# Altium PCB PCB.PcbDoc
Units mm, origin at the board's own origin, x right, y up, seen from the top; angles counter-clockwise.
Board outline 90 x 58 mm, 2 copper layers (Top Layer, Bottom Layer); 42 components, 34 nets, 227 pads, 40 vias.
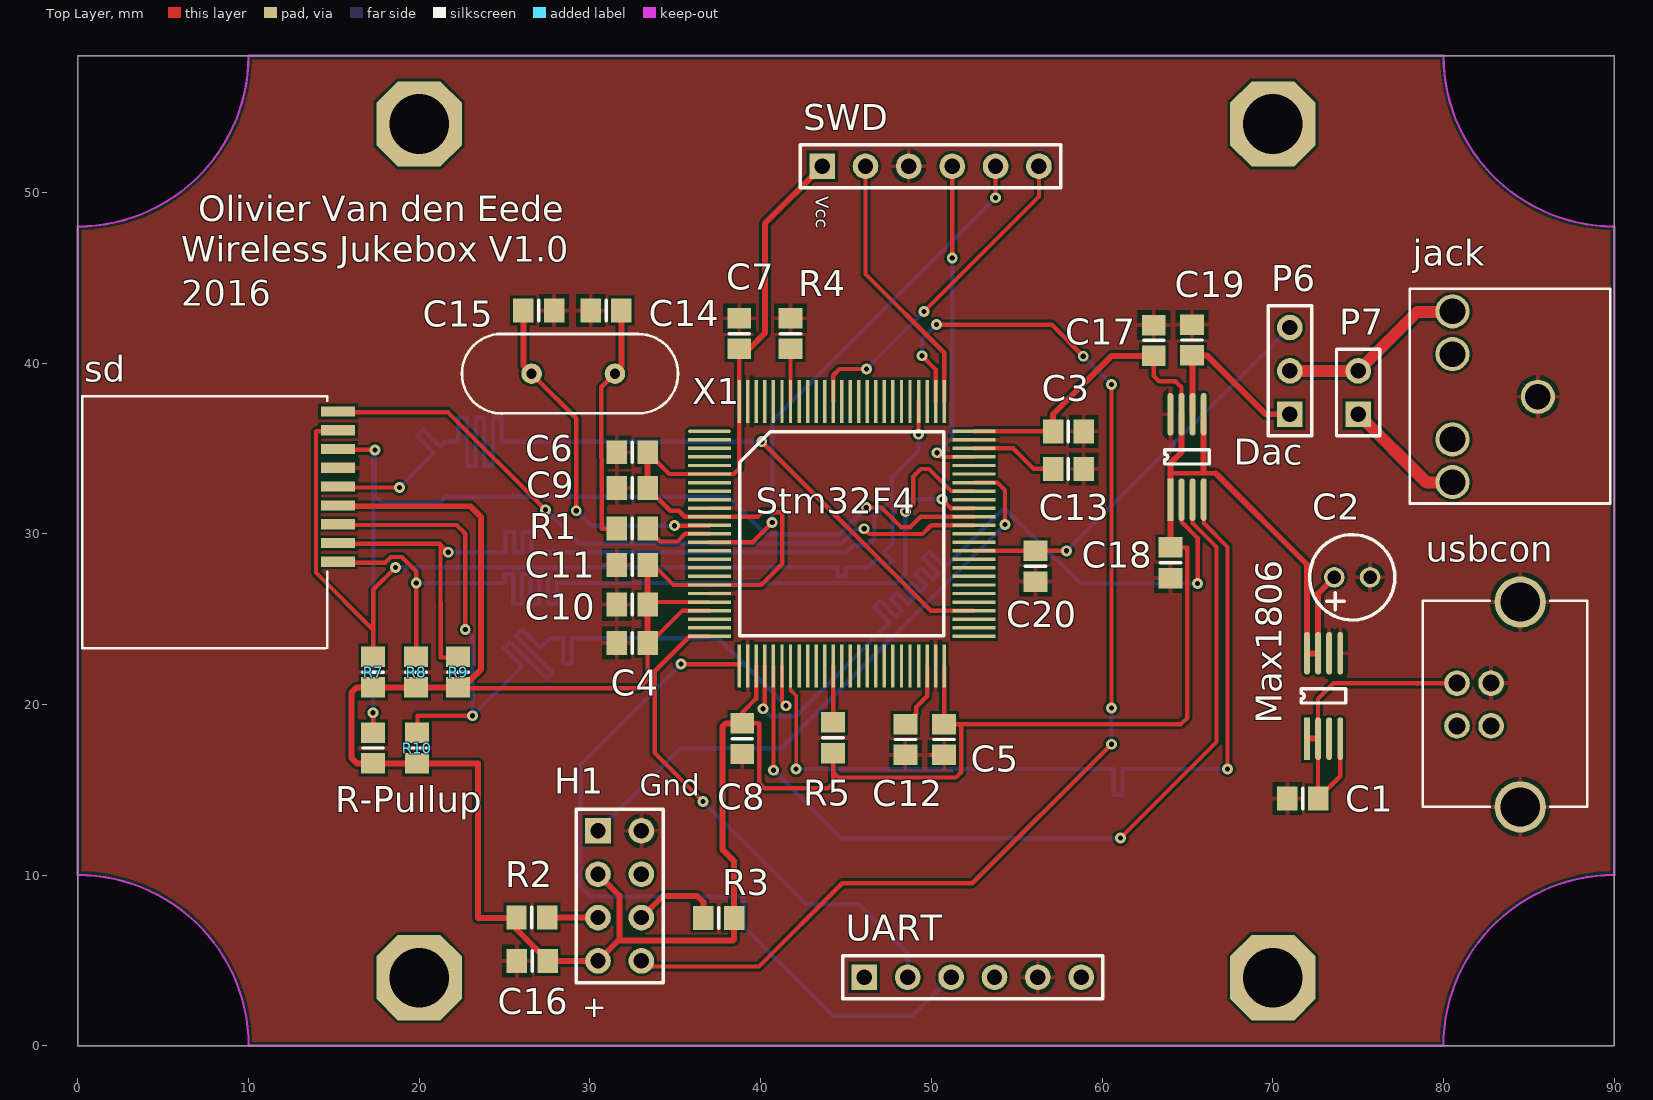
[diagram p0: Top Layer view]
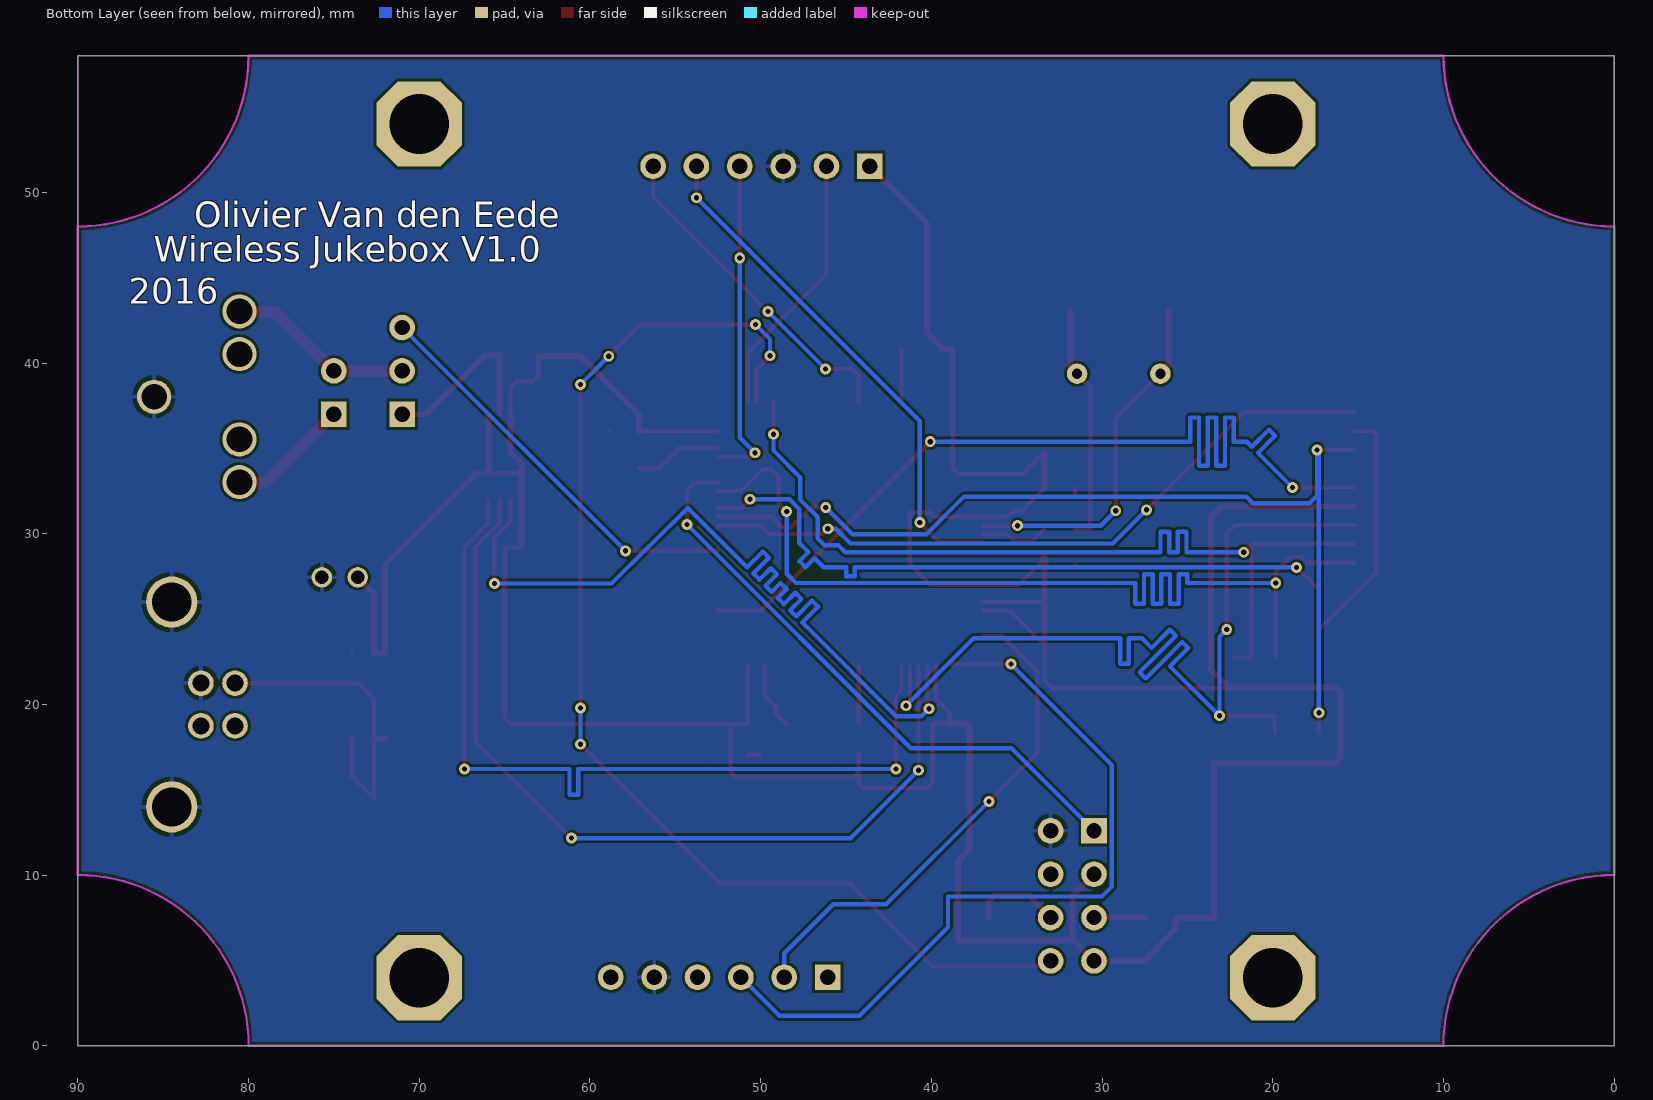
[diagram p1: Bottom Layer view, seen from below]

## Layer stack, top to bottom
Top Solder: solder mask 0.0102, Solder Resist, Dk 3.5
Top Layer: signal copper 0.0356
Dielectric 1: dielectric 0.32, FR-4, Dk 4.8
Bottom Layer: signal copper 0.0356
Bottom Solder: solder mask 0.0102, Solder Resist, Dk 3.5

## Board outline
0,0 0,58 90,58 90,0 0,0
cut-out: 80,0 90,0 90,10 ccw(c90,0)
cut-out: 0,0 10,0 ccw(c0,0) 0,10
cut-out: 80,58 90,58 90,48 cw(c90,58)
cut-out: 0,48 0,58 10,58 cw(c0,58)

## Design rules (kind name [scope] priority, off if disabled: settings)
AssemblyTestPointUsage SilkToBoardRegionClearance [All] p2:
Clearance [All] p1: gap=0.152
HoleSize [All] p1: absolutevalues=TRUE maxlimit=6.35 minlimit=0.3 maxpercent=80.000 minpercent=20.000
MinimumSolderMaskSliver [All] p1: minsoldermaskwidth=0.1
MinimumSolderMaskSliver SilkscreenOverComponentPads_1 [All] p2: minsoldermaskwidth=0.254
MinimumSolderMaskSliver SilkToSolderMaskClearance [IsPad] p3: minsoldermaskwidth=0.254
MinimumSolderMaskSliver SilkscreenOverComponentPads [All] p4: minsoldermaskwidth=0.254
PlaneClearance [All] p1: clearance=0.65
PolygonConnect [All] p1: connectstyle=Relief reliefconductorwidth=0.254 reliefentries=4 polygonreliefangle="90 Angle" airgapwidth=0.254
RoutingVias [All] p1: holewidth=0.305 width=0.635 viastyle="Through Hole" minholewidth=0.305 minwidth=0.635 maxholewidth=0.711 maxwidth=1.27
SilkToBoardRegionClearance SilkToBoardRegionClearance_1 [All] p1:
SilkToSolderMaskClearance SilkToSolderMaskClearance_1 [IsPad] p1: minsilkscreentomaskgap=0.178 clearancetoexposedcopper=TRUE
SolderMaskExpansion [All] p1: expansion=0.1
Width [All] p1: maxlimit=1 minlimit=0.152 preferedwidth=0.254
Width Width_clk [(InNet('NetC15_2') AND InNet('NetC14_2'))] p2: maxlimit=1 minlimit=0.152 preferedwidth=0.254
Width Width_Power [InNet('VCC')] p3: maxlimit=1 minlimit=0.152 preferedwidth=0.35
Width Width_Power_usb [InNet('USB')] p4: maxlimit=1 minlimit=0.254 preferedwidth=0.35
25 further rules are at their usual default settings.

## Classes and differential pairs
net class sdio: SDCLK SDCMD SDDAT0 SDDAT1 SDDAT2 SDDAT3
net class dac: DACCLK DACDIN DACSS

## Components (designator, comment, footprint, x,y, rotation, side; value= is the part's Value field where it differs from the comment)
C1 "capacitor" RESC2012N 71.75,14.5 r0 top
C2 "capacitor" Capacitor 75.7,27.45 r180 top
C3 "capacitor" RESC2012N 58.025,36 r180 top
C4 "capacitor" RESC2012N 32.475,23.6 r0 top
C5 "capacitor" RESC2012N 50.75,17.95 r90 top
C6 "capacitor" RESC2012N 32.475,34.775 r0 top
C7 "capacitor" RESC2012N 38.75,41.725 r270 top
C8 "capacitor" RESC2012N 38.925,18 r90 top
C9 "capacitor" RESC2012N 32.475,32.675 r180 top
C10 "capacitor" RESC2012N 32.475,25.85 r0 top
C11 "capacitor" RESC2012N 32.475,28.175 r0 top
C12 "capacitor" RESC2012N 48.475,17.95 r270 top
C13 "capacitor" RESC2012N 58.025,33.8 r0 top
C14 "capacitor" RESC2012N 30.95,43.075 r0 top
C15 "capacitor" RESC2012N 27,43.075 r180 top
C16 "capacitor" RESC2012N 26.625,4.975 r0 top
C17 "capacitor" RESC2012N 63.025,41.325 r90 top
C18 "capacitor" RESC2012N 64,28.3 r90 top
C19 "capacitor" RESC2012N 65.275,41.35 r90 top
C20 "capacitor" RESC2012N 56.1,28.1 r90 top
Dac "MAX5216" uMax8 64,32 r90 top
H1 "Esp8266" HDR2X4 30.475,12.6 r270 top
jack "3.5mm jack" "3.5 jack" 90.025,32.025 r90 top
Max1806 "Max1806" uMax8 72,18 r90 top
P6 "Output sel" HDR1X3 71,37 r90 top
P7 "mono stereo" HDR1X2 75,37 r90 top
R1 "" RESC2012N 32.475,30.3 r0 top
R2 "" RESC2012N 26.6,7.525 r0 top
R3 "" RESC2012N 37.55,7.5 r0 top
R4 "" RESC2012N 41.75,41.725 r90 top
R5 "" RESC2012N 44.25,18.05 r270 top
R7 "" RESC2012N 17.3,21.9 r270 top
R8 "" RESC2012N 19.825,21.9 r270 top
R9 "" RESC2012N 22.275,21.9 r270 top
R10 "" RESC2012N 19.875,17.45 r270 top
R-Pullup "" RESC2012N 17.3,17.45 r270 top (schematic designator R6)
sd "micro-sd" Micro-sd-socket 0,38.05 r270 top
Stm32F4 "stm32f411vet6" LQFP100 37,36 r0 top (schematic designator Stm32F411)
SWD "SWD header" HDR1X6 43.6,51.525 r0 top (schematic designator P3)
UART "uart" HDR1X6 46.075,4.025 r0 top (schematic designator P5)
usbcon "usb connector" "usb B-con" 94.775,14 r90 top
X1 "8Mhz" HC-49S 29.025,39.375 r0 top

## Footprints (in the part's own frame and the unit in brackets; to place one, negate y for a bottom-side part, rotate by r counter-clockwise, add the part's x,y. Pads: shape width x height; smd on the part's side, far side on the other; paste and mask are expansions set on the pad)
"3.5 jack" [mm]
  round 2 hole 1.5: 1(6,4.5) 2(1,9.5) 3(11,9.5) 4(3.5,9.5) 5(8.5,9.5)
  silkscreen extent -0.25,0.25 12.32,12, body extent 0,0 12,12, height 5
Capacitor [mm]
  round 1.2 hole 0.8: 1(0,0) 2(2.1,0)
  silkscreen extent -1.45,-2.5 3.55,2.5, body extent -1.44,-2.46 3.56,2.54, height 11
HC-49S [mm]
  round 1.2 hole 0.6: 1(-2.44,0) 2(2.44,0)
  silkscreen extent -6.52,-2.33 6.13,2.33, body extent -6.49,-2.3 6.11,2.3, height 3.7
HDR1X2 [mm] "Connector; Header; 2 Position"
  rect 1.5x1.5 hole 0.9: 1(0,0)
  round 1.5 hole 0.9: 2(2.54,0)
  silkscreen extent -1.27,-1.27 3.81,1.27
HDR1X3 [mm] "Connector; Header; 3 Position"
  rect 1.5x1.5 hole 0.9: 1(0,0)
  round 1.5 hole 0.9: 2(2.54,0) 3(5.08,0)
  silkscreen extent -1.27,-1.27 6.35,1.27
HDR1X6 [mm] "Connector; Header; 6 Position"
  rect 1.5x1.5 hole 0.9: 1(0,0)
  round 1.5 hole 0.9: 2(2.54,0) 3(5.08,0) 4(7.62,0) 5(10.16,0) 6(12.7,0)
  silkscreen extent -1.27,-1.27 13.97,1.27
HDR2X4 [mm] "Connector; Header; 4x2 Position"
  rect 1.5x1.5 hole 0.9: 1(0,0)
  round 1.5 hole 0.9: 2(0,2.54) 3(2.54,0) 4(2.54,2.54) 5(5.08,0) 6(5.08,2.54) 7(7.62,0) 8(7.62,2.54)
  silkscreen extent -1.27,-1.27 8.89,3.81
LQFP100 [mm]
  oval 2.5x0.2 smd: 1(0,0)
  rect 2.5x0.2 smd: 2(0,-0.5) 3(0,-1) 4(0,-1.5) 5(0,-2) 6(0,-2.5) 7(0,-3) 8(0,-3.5) 9(0,-4) 10(0,-4.5) 11(0,-5) 12(0,-5.5) 13(0,-6) 14(0,-6.5) 15(0,-7) 16(0,-7.5) 17(0,-8) 18(0,-8.5) 19(0,-9) 20(0,-9.5) 21(0,-10) 22(0,-10.5) 23(0,-11) 24(0,-11.5) 25(0,-12) 51(15.5,-12) 52(15.5,-11.5) 53(15.5,-11) 54(15.5,-10.5) 55(15.5,-10) 56(15.5,-9.5) 57(15.5,-9) 58(15.5,-8.5) 59(15.5,-8) 60(15.5,-7.5) 61(15.5,-7) 62(15.5,-6.5) 63(15.5,-6) 64(15.5,-5.5) 65(15.5,-5) 66(15.5,-4.5) 67(15.5,-4) 68(15.5,-3.5) 69(15.5,-3) 70(15.5,-2.5) 71(15.5,-2) 72(15.5,-1.5) 73(15.5,-1) 74(15.5,-0.5) 75(15.5,0)
  rect 0.2x2.5 smd: 26(1.75,-13.75) 27(2.25,-13.75) 28(2.75,-13.75) 29(3.25,-13.75) 30(3.75,-13.75) 31(4.25,-13.75) 32(4.75,-13.75) 33(5.25,-13.75) 34(5.75,-13.75) 35(6.25,-13.75) 36(6.75,-13.75) 37(7.25,-13.75) 38(7.75,-13.75) 39(8.25,-13.75) 40(8.75,-13.75) 41(9.25,-13.75) 42(9.75,-13.75) 43(10.25,-13.75) 44(10.75,-13.75) 45(11.25,-13.75) 46(11.75,-13.75) 47(12.25,-13.75) 48(12.75,-13.75) 49(13.25,-13.75) 50(13.75,-13.75) 76(13.75,1.75) 77(13.25,1.75) 78(12.75,1.75) 79(12.25,1.75) 80(11.75,1.75) 81(11.25,1.75) 82(10.75,1.75) 83(10.25,1.75) 84(9.75,1.75) 85(9.25,1.75) 86(8.75,1.75) 87(8.25,1.75) 88(7.75,1.75) 89(7.25,1.75) 90(6.75,1.75) 91(6.25,1.75) 92(5.75,1.75) 93(5.25,1.75) 94(4.75,1.75) 95(4.25,1.75) 96(3.75,1.75) 97(3.25,1.75) 98(2.75,1.75) 99(2.25,1.75) 100(1.75,1.75)
  silkscreen extent 1.78,-11.96 13.71,-0.04
Micro-sd-socket [mm]
  rect 0.6x2 smd: 1(9.689,15.24) 2(8.589,15.24) 3(7.489,15.24) 4(6.389,15.24) 5(5.289,15.24) 6(4.189,15.24) 7(3.089,15.24) 8(1.989,15.24) 9(0.889,15.24)
  silkscreen extent 0,0.25 14.75,14.61, body extent 0,0.13 14.73,14.61, height 2
RESC2012N [mm] "Chip Resistor, Body 2.0x1.3mm, IPC Medium Density"
  rect 1.2x1.4 smd: 1(-0.9,0) 2(0.9,0)
  silkscreen extent 0,-0.6 0,0.6, body extent -1,-0.63 1,0.63, height 0.78
uMax8 [mm]
  rect 2.5x0.35 smd: 1(0,0)
  oval 2.5x0.35 smd: 2(0,-0.65) 3(0,-1.3) 4(0,-1.95) 5(5,-1.95) 6(5,-1.3) 7(5,-0.65) 8(5,0)
  silkscreen extent 2.09,-2.28 2.91,0.33
"usb B-con" [mm]
  round 1.5 hole 1: D+(4.75,11.99) D-(4.75,13.99) Gnd(7.25,11.99) Vcc(7.25,13.99)
  round 3 hole 2.3: gnd(0,10.28) gnd(12,10.28)
  silkscreen extent 0,6.35 12.07,16, body extent 0,0 12.06,16, height 10.5

## Part data
C1 C3 C4 C5 C6 C7 C8 C9 C10 C11 C12 C13 C14 C15 C16 C17 C18 C19 C20: library part cap
C2: library part cap_Pol
H1: library part "Header 4X2", "Header, 4-Pin, Dual row"
P6: library part "Header 3", "Header, 3-Pin"
P7: library part "Header 2", "Header, 2-Pin"
R1 R2 R3 R4 R5 R7 R8 R9 R10 R-Pullup: library part Res2, "Resistor"
SWD UART: library part "Header 6", "Header, 6-Pin"
X1: library part Cilinder_kristal

## Free pads (board coordinates)
  oct 5x5 hole 3.5: GND(20,4) GND(20,54) GND(70,4) GND(70,54)

## Via types
v1: diameter 0.635, hole 0.305, Top Layer to Bottom Layer, 40 vias

## Nets (pads, with @x,y where several pads share a name; then routed paths per layer and width w, separated by ;. In a path a pad name is that pad's centre, name@x,y a point inside that pad or via, vN(x,y) a via of type N, cw(c..) or ccw(c..) an arc to the next point about the centre after c; other vN are vias at no path point)
CARDDET: sd.9 Stm32F4.64 | length 41.1
  Top Layer w0.254: sd.9@15.24,37.111 21.69,37.111 v1(27.4,31.401) ; v1(46.064,30.291) 46.37,29.985 49.479,29.985 49.995,30.5 Stm32F4.64
  Bottom Layer w0.254: v1(27.4,31.401) 29.375,29.426 44.732,29.426 45.597,30.291 v1(46.064,30.291)
DACCLK: Dac.3 Stm32F4.30 | length 50.8
  Top Layer w0.254: v1(40.75,16.15) Stm32F4.30 ; v1(61.075,12.175) 66.7,17.8 66.7,29.223 65.3,30.623 Dac.3
  Bottom Layer w0.254: v1(40.75,16.15) 44.725,12.175 v1(61.075,12.175)
DACDIN: Dac.4 Stm32F4.32 | length 50.8
  Top Layer w0.2: Stm32F4.32 41.75,20.848 42.075,20.523 v1(42.075,16.221) ; 65.95,30.623 Dac.4
  Top Layer w0.254: 65.95,30.623 67.35,29.223 v1(67.35,16.225)
  Bottom Layer w0.254: v1(42.075,16.221) 51.435,16.221 60.688,16.221 60.688,14.714 61.196,14.714 61.196,16.221 61.45,16.221 61.75,16.221 ; 61.75,16.225 v1(67.35,16.225)
DACOUT: C19.1 Dac.6 P6.1 | length 10.6
  Top Layer w0.254: C19.1 C19.1@65.3,40.425
  Top Layer w0.35: C19.1 66.125,40.45 69.575,37 P6.1 ; Dac.6 C19.1@65.3,40.425
DACSS: Dac.2 Stm32F4.29 | length 50.8
  Top Layer w0.254: v1(40.145,19.748) 40.25,19.854 Stm32F4.29 ; Dac.2 64.65,30.698 65.595,29.753 v1(65.595,27.089)
  Bottom Layer w0.254: v1(40.145,19.748) 40.576,19.317 42.075,19.317 47.379,24.621 47.559,24.8 46.635,25.724 46.994,26.084 47.918,25.16 48.277,25.519 47.612,26.184 47.971,26.543 48.636,25.878 48.996,26.237 48.476,26.756 48.836,27.116 49.355,26.596 49.714,26.956 49.047,27.623 49.406,27.982 50.073,27.315 50.432,27.674 49.509,28.598 49.868,28.957 50.792,28.033 54.267,31.509 58.737,27.089 v1(65.595,27.089)
ESPRX: H1.8 Stm32F4.77 | length 71
  Top Layer w0.254: H1.8 33.345,4.65 39.9,4.65 44.775,9.525 52.4,9.525 v1(60.55,17.675) ; v1(49.45,40.425) 50.25,39.625 Stm32F4.77 ; v1(50.3,42.25) 57.05,42.25 v1(58.9,40.4) ; v1(60.55,19.8) v1(60.55,38.75)
  Bottom Layer w0.254: v1(49.45,40.425) 49.45,41.4 v1(50.3,42.25) ; v1(58.9,40.4) v1(60.55,38.75) ; v1(60.55,17.675) v1(60.55,19.8)
ESPTX: H1.1 Stm32F4.69 | length 35.3
  Top Layer w0.254: Stm32F4.69 53.868,33 54.318,32.55 v1(54.318,30.543)
  Bottom Layer w0.254: H1.1 35.312,17.437 41.211,17.437 v1(54.318,30.543)
GND: C1.1 C2.1 C3.1 C4.1 C5.1 C6.1 C7.1 C8.1 C9.2 C10.1 C11.1 C12.2 C13.2 C14.1 C15.1 C16.1 C17.2 C18.1 C19.2 C20.1 Dac.8 H1.2 jack.1 Max1806.5 Max1806.6 R4.2 sd.6 Stm32F4.10 Stm32F4.20 Stm32F4.27 Stm32F4.49 Stm32F4.74 Stm32F4.99 SWD.3 UART.5 usbcon.gnd usbcon.Gnd | length 1.8
  Top Layer w0.254: C11.1 C11.1@31.585,28.175 ; C9.2@31.575,32.255 C9.2 ; 50.013,17.05 C5.1 ; C3.1@58.925,35.979 C3.1 ; usbcon.Gnd@82.359,21.25 usbcon.Gnd usbcon.Gnd@83.01,21.25
JACKOUT: jack.3 P6.2 P7.2 | length 10.9
  Top Layer w0.7: P6.2 P7.2 78.46,43 jack.3@80.5,43
JTCK: Stm32F4.76 SWD.2 | length 15.7
  Top Layer w0.254: SWD.2 46.14,45.21 50.75,40.6 Stm32F4.76
JTDO: Stm32F4.89 SWD.6 | length 19.7
  Top Layer w0.254: Stm32F4.89 44.25,39.285 44.615,39.65 v1(46.2,39.65) ; v1(49.575,43.025) 56.3,49.75 SWD.6
  Bottom Layer w0.254: v1(46.2,39.65) v1(49.575,43.025)
JTMS: Stm32F4.72 SWD.4 | length 19.4
  Top Layer w0.254: v1(50.328,34.748) 50.575,34.5 Stm32F4.72 ; SWD.4 51.225,51.52 v1(51.225,46.15)
  Bottom Layer w0.254: v1(50.328,34.748) 51.225,35.645 v1(51.225,46.15)
NetC12_1: C12.1 Stm32F4.48 | length 3.9
  Top Layer w0.254: C12.1 49.115,19.49 49.115,19.85 49.75,20.485 Stm32F4.48
NetC13_1: C13.1 Stm32F4.73 | length 5.1
  Top Layer w0.254: Stm32F4.73 54.8,35 56,33.8 C13.1
NetC14_2: C14.2 R1.1 X1.2 | length 14.1
  Top Layer w0.254: X1.2 30.67,38.58 30.696,30.3 R1.1
  Top Layer w0.35: X1.2 31.85,39.76 C14.2
NetC15_2: C15.2 Stm32F4.12 X1.1 | length 21.2
  Top Layer w0.254: X1.1 29.2,36.76 v1(29.2,31.35) ; v1(34.95,30.475) 36.975,30.475 Stm32F4.12
  Top Layer w0.35: C15.2 26.1,39.86 X1.1
  Bottom Layer w0.254: v1(29.2,31.35) 30.075,30.475 v1(34.95,30.475)
NetH1_5: H1.5 R2.2 | length 3
  Top Layer w0.254: H1.5@30.47,7.525 H1.5
  Top Layer w0.35: R2.2 H1.5@30.47,7.525
NetH1_6: H1.6 R3.1 | length 5.2
  Top Layer w0.35: H1.6 34.281,8.786 36.284,8.786 36.65,8.42 R3.1
Netjack_2: jack.2 P7.1 | length 7.2
  Top Layer w0.7: P7.1 79,33 jack.2@80.5,33
NetR1_2: R1.2 Stm32F4.13 | length 4.1
  Top Layer w0.254: R1.2 34.125,29.55 35.125,29.55 35.575,30 Stm32F4.13
NetR4_1: R4.1 Stm32F4.94 | length 3.1
  Top Layer w0.254: Stm32F4.94 R4.1
NetR5_1: R5.1 Stm32F4.37 | length 3.3
  Top Layer w0.254: R5.1 Stm32F4.37
NRST: Stm32F4.14 SWD.5 | length 30.4
  Top Layer w0.254: Stm32F4.14 39.518,29.5 v1(40.675,30.657) ; v1(53.76,49.685) SWD.5
  Bottom Layer w0.254: v1(40.675,30.657) 40.675,36.6 v1(53.76,49.685)
PCRX: Stm32F4.26 UART.3 | length 45.9
  Top Layer w0.254: v1(35.344,22.365) 38.75,22.365 Stm32F4.26
  Bottom Layer w0.254: v1(35.344,22.365) 29.426,16.446 29.426,9.334 30.01,8.75 39.027,8.75 39.027,6.948 44.2,1.775 48.905,1.775 UART.3
PCTX: Stm32F4.25 UART.2 | length 29.9
  Top Layer w0.254: v1(36.625,14.325) 33.795,17.155 33.795,21.943 35.852,24 Stm32F4.25
  Bottom Layer w0.254: v1(36.625,14.325) 42.65,8.3 45.75,8.3 48.615,5.435 UART.2
PWMOUT: C20.2 P6.3 Stm32F4.61 | length 23.9
  Top Layer w0.254: Stm32F4.61 C20.2 v1(57.92,29)
  Bottom Layer w0.254: v1(57.92,29) P6.3
SDCLK: sd.5 Stm32F4.54 | length 59.5
  Top Layer w0.254: sd.5@15.24,32.711 v1(18.843,32.711) ; v1(40.068,35.395) 49.963,25.5 Stm32F4.54
  Bottom Layer w0.254: v1(18.843,32.711) 20.691,34.559 20.87,34.739 19.868,35.741 20.227,36.101 21.23,35.098 21.526,35.395 21.78,35.395 22.288,35.395 22.288,36.813 22.796,36.813 22.796,35.395 22.796,33.977 23.304,33.977 23.304,35.395 23.304,36.813 23.812,36.813 23.812,35.395 23.812,33.977 24.32,33.977 24.32,35.395 24.32,36.813 24.828,36.813 24.828,35.395 25.625,35.395 v1(40.068,35.395)
SDCMD: R10.1 sd.3 Stm32F4.31 | length 59.1
  Top Layer w0.254: sd.3@15.24,30.511 22.194,30.511 22.695,30.01 v1(22.695,24.397) ; R10.1 19.9,19.342 ; 19.875,19.317 19.9,19.342 ; v1(23.127,19.342) 19.9,19.342 ; Stm32F4.31 41.25,20.154 v1(41.478,19.926)
  Bottom Layer w0.254: v1(22.695,24.397) 23.127,23.965 v1(23.127,19.342) 25.842,22.058 26.022,22.237 24.955,23.304 25.314,23.664 26.381,22.597 27.448,21.53 27.807,21.889 26.74,22.956 25.673,24.023 26.033,24.382 27.1,23.315 27.459,23.674 27.673,23.889 27.927,23.889 28.435,23.889 28.435,22.38 28.943,22.38 28.943,23.889 29.35,23.889 37.516,23.889 v1(41.478,19.926)
SDDAT0: R-Pullup.1 sd.7 Stm32F4.65 | length 59.1
  Top Layer w0.254: sd.7@15.24,34.911 v1(17.412,34.911) ; R-Pullup.1 v1(17.3,19.52) ; v1(46.187,31.535) 47.079,31.535 48.223,30.391 48.762,30.391 49.371,31 Stm32F4.65
  Bottom Layer w0.254: v1(17.3,19.52) v1@17.3,34.911 ; v1(17.412,34.911) 17.412,32.233 17.856,31.788 21.171,31.788 21.558,32.175 38.081,32.175 40.284,29.972 44.624,29.972 v1(46.187,31.535)
SDDAT1: R7.1 sd.8 Stm32F4.66 | length 59.5
  Top Layer w0.254: sd.8@15.24,36.011 13.983,36.011 13.957,35.986 13.957,27.724 17.3,24.381 ; R7.1 17.3,24.381 ; v1(18.605,28.029) 17.3,26.723 17.3,24.381 ; v1(50.624,32.019) 51.143,31.5 Stm32F4.66
  Bottom Layer w0.254: v1(18.605,28.029) 43.725,28.029 43.979,28.029 44.487,28.029 44.487,27.521 44.995,27.521 44.995,28.029 45.503,28.029 46.011,28.029 46.301,28.029 46.48,28.208 46.84,28.568 47.369,28.038 47.728,28.397 47.199,28.927 47.261,28.989 47.745,29.473 47.745,31.449 48.316,32.019 v1(50.624,32.019)
SDDAT2: R8.1 sd.1 Stm32F4.68 | length 59.5
  Top Layer w0.254: sd.1@15.24,28.311 18.018,28.311 18.344,28.637 18.975,28.637 19.825,27.788 v1(19.825,27.114) R8.1 ; v1(48.476,31.305) 48.933,31.763 48.933,33.35 49.378,33.795 49.86,33.795 51.155,32.5 Stm32F4.68
  Bottom Layer w0.254: v1(19.825,27.114) 24.75,27.114 25.004,27.114 25.004,27.622 25.512,27.622 25.512,27.114 25.512,25.892 26.02,25.892 26.02,27.114 26.02,27.622 26.528,27.622 26.528,27.114 26.528,25.892 27.036,25.892 27.036,27.114 27.036,27.622 27.544,27.622 27.544,27.114 27.544,25.892 28.052,25.892 28.052,27.114 29.5,27.114 47.93,27.114 48.476,27.661 v1(48.476,31.305)
SDDAT3: R9.1 sd.2 Stm32F4.79 | length 59.5
  Top Layer w0.254: v1(21.704,28.918) 21.247,29.375 ; R9.1@22.275,22.75 21.272,22.75 21.247,29.375 ; v1(49.25,35.825) Stm32F4.79 ; 21.247,29.375 15.24,29.411 21.211,29.411 21.247,29.375
  Bottom Layer w0.254: v1(21.704,28.918) 24.8,28.918 25.054,28.918 25.054,30.117 25.562,30.117 25.562,28.918 26.07,28.918 26.07,30.117 26.578,30.117 26.578,28.918 28,28.918 45.047,28.918 45.447,29.318 46.248,29.318 46.661,29.731 46.661,30.975 47.688,32.003 47.688,33.312 49.25,34.874 v1(49.25,35.825)
USB: C1.2 Max1806.1 Max1806.2 Max1806.4 usbcon.Vcc | length 19
  Top Layer w0.254: Max1806.4 73.95,15.8 C1.2 Max1806.2 72.65,20.341 73.559,21.25 usbcon.Vcc
  Top Layer w0.35: Max1806.1 Max1806.2
VCC: C2.2 C3.2 C4.2 C5.2 C6.2 C7.2 C8.2 C9.1 C10.2 C11.2 C16.2 C17.1 C18.2 Dac.1 Dac.5 Dac.7 H1.3 H1.7 Max1806.7 Max1806.8 R2.1 R3.2 R5.2 R7.2 R8.2 R9.2 R10.2 R-Pullup.2 sd.4 Stm32F4.6 Stm32F4.11 Stm32F4.19 Stm32F4.21 Stm32F4.22 Stm32F4.28 Stm32F4.50 Stm32F4.75 Stm32F4.100 SWD.1 | length 261.6
  Top Layer w0.254: R9.2@22.225,21 22.275,20.95 22.512,20.95 32.888,20.95 33.375,21.438 C4.2@33.375,23.45 ; R2.1@25.604,7.5 R2.1@25.7,7.404 ; H1.7@30.47,4.975 H1.7 ; C4.2 C4.2@33.375,23.45 ; C10.2 33.375,26.25 33.625,26 Stm32F4.21 ; C11.2@33.375,28.525 33.55,28.35 34.9,27 Stm32F4.19 40.03,27 41.272,28.242 41.272,31.219 41.237,31.254 40.078,31.254 39.824,31 Stm32F4.11 35.55,31 35.2,31.35 34.7,31.35 C9.1 ; C6.2 34.65,33.5 Stm32F4.6 38.43,33.5 38.75,33.82 Stm32F4.100 C7.2 ; Stm32F4.22 35.425,25.5 C4.2@33.375,23.45 ; 38.395,6.175 38.45,6.23 ; Stm32F4.28 39.75,21.33 39.736,21.316 39.736,20.345 38.925,19.534 C8.2 39.891,18.9 39.916,18.875 39.916,15.405 40.234,15.088 43.933,15.088 44.25,15.405 44.25,16.04 ; R5.2 44.25,16.04 ; Stm32F4.50 C5.2 ; Stm32F4.75 C3.2 ; C17.1 63.025,39.248 63.348,38.925 64.307,38.925 64.65,38.583 Dac.7 ; C18.2 64.96,29.2 64.986,29.175 64.986,19.215 64.621,18.85 C5.2 ; 64,33.515 64.025,33.541 66.662,33.541 ; 72,26.675 72.075,26.675 ; 44.25,16.04 44.568,15.723 51.435,15.723 51.752,16.04 51.752,18.825 C5.2
  Top Layer w0.35: sd.4@15.24,31.611 22.999,31.611 23.635,30.975 23.635,22.073 R9.2@22.512,20.95 ; R9.2@22.225,21 R8.2 R7.2 16.345,21 16.025,20.68 16.025,16.87 16.345,16.55 R-Pullup.2 R10.2 23.457,16.55 23.457,7.5 R2.1@25.604,7.5 ; R2.1@25.7,7.404 25.7,6.825 C16.2@27.525,5 ; C16.2 H1.7@30.47,4.975 ; H1.7 31.67,6.175 ; H1.3 31.725,8.81 31.725,6.23 31.67,6.175 ; C4.2 C10.2 ; C10.2@33.375,26.25 C11.2 ; C9.1 C6.2 ; 38.395,6.175 31.67,6.175 ; 38.45,6.23 R3.2 38.45,10.826 37.775,11.501 37.775,18.715 37.96,18.9 C8.2 ; C7.2 39.325,40.825 40.25,41.75 40.25,48.175 SWD.1 ; C3.2 57.125,36.995 60.555,40.425 C17.1 ; C18.2 Dac.1 64,33.515 64,34.125 64.65,34.775 Dac.7 ; 65.95,33.6 Dac.5 ; 66.662,33.541 72,28.203 72,26.675 Max1806.8 Max1806.7 72.65,26.5 C2.2@73.575,27.425
  Top Layer w0.5: C11.2 C11.2@33.375,28.525
pads on no net: H1.4 jack.4 jack.5 Max1806.3 Stm32F4.1 Stm32F4.2 Stm32F4.3 Stm32F4.4 Stm32F4.5 Stm32F4.7 Stm32F4.8 Stm32F4.9 Stm32F4.15 Stm32F4.16 Stm32F4.17 Stm32F4.18 Stm32F4.23 Stm32F4.24 Stm32F4.33 Stm32F4.34 Stm32F4.35 Stm32F4.36 Stm32F4.38 Stm32F4.39 Stm32F4.40 Stm32F4.41 Stm32F4.42 Stm32F4.43 Stm32F4.44 Stm32F4.45 Stm32F4.46 Stm32F4.47 Stm32F4.51 Stm32F4.52 Stm32F4.53 Stm32F4.55 Stm32F4.56 Stm32F4.57 Stm32F4.58 Stm32F4.59 Stm32F4.60 Stm32F4.62 Stm32F4.63 Stm32F4.67 Stm32F4.70 Stm32F4.71 Stm32F4.78 Stm32F4.80 Stm32F4.81 Stm32F4.82 Stm32F4.83 Stm32F4.84 Stm32F4.85 Stm32F4.86 Stm32F4.87 Stm32F4.88 Stm32F4.90 Stm32F4.91 Stm32F4.92 Stm32F4.93 Stm32F4.95 Stm32F4.96 Stm32F4.97 Stm32F4.98 UART.1 UART.4 UART.6 usbcon.D+ usbcon.D-

## Polygon pours and split planes (outlines as drawn)
GND on Top Layer "Top Layer-GND" (solid, pour order 4): 0,58 90,58 90,0 0,0 0,58
GND on Bottom Layer "bottom Layer-GND" (solid, pour order 3): 0,58 90,58 90,0 0,0 0,58

## Keep-outs
Keep-Out Layer:
  lines w0.125: 0,10.012 cw(c0,0) 10.012,0 ; 0,48 ccw(c0,58) 10,58 ; 79.988,0 cw(c90,0) 90,10.012 ; 80,58 ccw(c90,58) 90,48
  lines w0.152: 0,10.012 0,48 ; 10.012,0 79.994,0 ; 10.012,58 80,58 ; 90,10.012 90,47.988

## Silkscreen, mask and mechanical layers (free items; w line width, h text height)
Top Overlay:
  text "Vcc" at 43.225,49.775 h0.76 r270
  text "Olivier Van den Eede" at 7.05,48.3 h1.5
  text "Wireless Jukebox V1.0" at 6.075,45.925 h1.5
  text "2016" at 6.075,43.35 h1.5
Bottom Overlay:
  text "Olivier Van den Eede" at 83.175,47.95 h1.5
  text "Wireless Jukebox V1.0" at 85.55,45.925 h1.5
  text "2016" at 87.025,43.475 h1.5

## Text inside footprints (layer, text, board x,y; h text height)
H1: Top Overlay "+" at 29.725,2.95 h1.27 r270; Top Overlay "Gnd" at 32.925,14.65 h1.27